# EAGLE board CBS - Cigar Box Sequencer - 8 step (EAGLE 6.6.0)

Size 241 x 0 mm. Coordinates in mm from the lower left corner, seen from the top.
Outline: 0,0 241,0
Copper layers (1*16): Top 0.035mm / dielectric 1.5mm / Bottom 0.035mm
Design rules "default": minimum track width 10mil, minimum drill 24mil, track to track 8mil, track to pad 8mil, pad to pad 8mil, via to via 8mil, smd to smd 8mil, copper to edge 40mil, drill to drill 8mil, minimum pad ring 10mil, minimum via ring 8mil, stop-mask expansion 4mil, vias tented up to drill 0mil, thermal gap 10mil

## Footprints (pad centres in the part's own frame; a part is rotated, then mirrored left to right if it is on the bottom)
EURORACK-POWER = drill 0.8: P$1 -1.27,5.08; P$2 1.27,5.08; P$3 -1.27,2.54; P$4 1.27,2.54; P$5 -1.27,0; P$6 1.27,0; P$7 -1.27,-2.54; P$8 1.27,-2.54; P$9 -1.27,-5.08; P$10 1.27,-5.08

## Placement (x,y rotation side)
E$1  [KNOB_BOSS_MEDIUM]  12,22.5 0 top  (outside the outline)
E$2  [KNOB_BOSS_MEDIUM]  229,22.5 0 top  (outside the outline)
E$3  [KNOB_BOSS_MEDIUM]  43,22.5 0 top  (outside the outline)
E$4  [KNOB_BOSS_MEDIUM]  74,22.5 0 top  (outside the outline)
E$5  [KNOB_BOSS_MEDIUM]  105,22.5 0 top  (outside the outline)
E$6  [KNOB_BOSS_MEDIUM]  136,22.5 0 top  (outside the outline)
E$7  [KNOB_BOSS_MEDIUM]  167,22.5 0 top  (outside the outline)
E$8  [KNOB_BOSS_MEDIUM]  198,22.5 0 top  (outside the outline)
E$9  [3.5MM_JACK_TAYDA]  43,48.5 270 top  (outside the outline)
E$10  [3.5MM_JACK_TAYDA]  74,48.5 270 top  (outside the outline)
E$11  [3.5MM_JACK_TAYDA]  105,48.5 270 top  (outside the outline)
E$12  [3.5MM_JACK_TAYDA]  136,48.5 270 top  (outside the outline)
E$13  [3.5MM_JACK_TAYDA]  167,48.5 270 top  (outside the outline)
E$14  [3.5MM_JACK_TAYDA]  198,48.5 270 top  (outside the outline)
E$15  [3.5MM_JACK_TAYDA]  229,48.5 270 top  (outside the outline)
E$16  [3.5MM_JACK_TAYDA]  12,88.5 90 top  (outside the outline)
E$17  [TOGGLE_SWITCH_TAYDA]  43,88.5 90 top  (outside the outline)
E$18  [LED_3MM]  51,48.5 0 top  (outside the outline)
E$19  [LED_3MM]  82,48.5 0 top  (outside the outline)
E$20  [LED_3MM]  113,48.5 0 top  (outside the outline)
E$21  [LED_3MM]  144,48.5 0 top  (outside the outline)
E$22  [LED_3MM]  175,48.5 0 top  (outside the outline)
E$23  [LED_3MM]  206,48.5 0 top  (outside the outline)
E$24  [LED_3MM]  237,48.5 0 top  (outside the outline)
E$25  [POTENTIOMETER_TAYDA_6MM]  12,22.5 0 top  (outside the outline)
E$26  [POTENTIOMETER_TAYDA_6MM]  43,22.5 0 top  (outside the outline)
E$27  [POTENTIOMETER_TAYDA_6MM]  74,22.5 0 top  (outside the outline)
E$28  [POTENTIOMETER_TAYDA_6MM]  105,22.5 0 top  (outside the outline)
E$29  [POTENTIOMETER_TAYDA_6MM]  229,22.5 0 top  (outside the outline)
E$30  [POTENTIOMETER_TAYDA_6MM]  198,22.5 0 top  (outside the outline)
E$31  [POTENTIOMETER_TAYDA_6MM]  167,22.5 0 top  (outside the outline)
E$32  [POTENTIOMETER_TAYDA_6MM]  136,22.5 0 top  (outside the outline)
E$33  [SLIDE_SWITCH_2P3T_TAYDA]  40,64 0 top  (outside the outline)
E$34  [ROTARY_SWITCH_TAYDA]  226.5,74.5 0 top  (outside the outline)
E$35  [3.5MM_JACK_TAYDA]  12,71 90 top  (outside the outline)
E$36  [3.5MM_JACK_TAYDA]  12,48.5 270 top  (outside the outline)
E$37  [3.5MM_JACK_TAYDA]  84,69.5 90 top  (outside the outline)
E$38  [EURORACK-POWER]  143.5,88.5 90 top  (outside the outline)
E$39  [3.5MM_JACK_TAYDA]  116,67 270 top  (outside the outline)
E$40  [POTENTIOMETER_TAYDA_6MM]  145,67 90 top  (outside the outline)
E$41  [TOGGLE_SWITCH_TAYDA]  171,67.5 90 top  (outside the outline)
E$42  [KNBO_BOSS_SMALL]  145,67 0 top  (outside the outline)
E$43  [LED_3MM]  51,66 0 top  (outside the outline)
E$44  [LED_3MM]  51,71 0 top  (outside the outline)
E$45  [LED_3MM]  51,76 0 top  (outside the outline)
E$46  [3.5MM_JACK_TAYDA]  188.5,67 270 top  (outside the outline)
E$47  [LED_3MM]  26,80.5 0 top  (outside the outline)
E$48  [3.5MM_JACK_TAYDA]  198.5,88.5 270 top  (outside the outline)
E$49  [TOGGLE_SWITCH_TAYDA]  12,0 180 top
E$50  [3.5MM_JACK_TAYDA]  183,88.5 270 top  (outside the outline)
E$51  [3.5MM_JACK_TAYDA]  167.5,88.5 270 top  (outside the outline)
E$52  [3.5MM_JACK_TAYDA]  74,88.5 90 top  (outside the outline)
E$53  [3.5MM_JACK_TAYDA]  89.5,88.5 90 top  (outside the outline)
E$54  [3.5MM_JACK_TAYDA]  105,88.5 90 top  (outside the outline)
E$55  [LED_3MM]  20,48.5 0 top  (outside the outline)
E$56  [LED_3MM]  4,71 0 top  (outside the outline)
E$57  [LED_3MM]  4,88.5 0 top  (outside the outline)
E$58  [LED_3MM]  76,69.5 0 top  (outside the outline)
E$59  [LED_3MM]  124,67 0 top  (outside the outline)
E$60  [LED_3MM]  66,88.5 0 top  (outside the outline)
E$61  [LED_3MM]  81.5,88.5 0 top  (outside the outline)
E$62  [LED_3MM]  97,88.5 0 top  (outside the outline)
E$63  [LED_3MM]  175.5,88.5 0 top  (outside the outline)
E$64  [LED_3MM]  191,88.5 0 top  (outside the outline)
E$65  [LED_3MM]  206.5,88.5 0 top  (outside the outline)
E$66  [LED_3MM]  196.5,67 0 top  (outside the outline)
E$67  [TOGGLE_SWITCH_TAYDA]  43,0 180 top
E$68  [TOGGLE_SWITCH_TAYDA]  74,0 180 top
E$69  [TOGGLE_SWITCH_TAYDA]  105,0 180 top
E$70  [TOGGLE_SWITCH_TAYDA]  136,0 180 top
E$71  [TOGGLE_SWITCH_TAYDA]  167,0 180 top
E$72  [TOGGLE_SWITCH_TAYDA]  198,0 180 top
E$73  [TOGGLE_SWITCH_TAYDA]  229,0 180 top

## Library data of the parts
E$1-E$37 E$39-E$73 = !synth_panel
E$38 = !synth_sch

## Text on the board
FrontPanel: EuroPower | FILTER-LVL
PanelText: FREQ | FREQ-RANGE | X1 | X2 | X3 | Q1 | Q2 | Q3 | INT-OSC | Binary Step Inputs | Binary Step Outputs | CLK | CLK-SRC | Reset | GATE_OUT | FLTR-RNG | CV-OUT | 1 | 2 | 3 | 4 | 5 | 6 | 7 | 8
Artwork: Internal | External | INT+EXT | INPUTS | OUTPUTS